# Altium PCB DRV8874 motor driver.PcbDoc
Units mm, origin at the board's own origin, x right, y up, seen from the top; angles counter-clockwise.
Board outline 33.5 x 20 mm, 2 copper layers (Top Layer, Bottom Layer); 15 components, 18 nets, 56 pads, 21 vias.
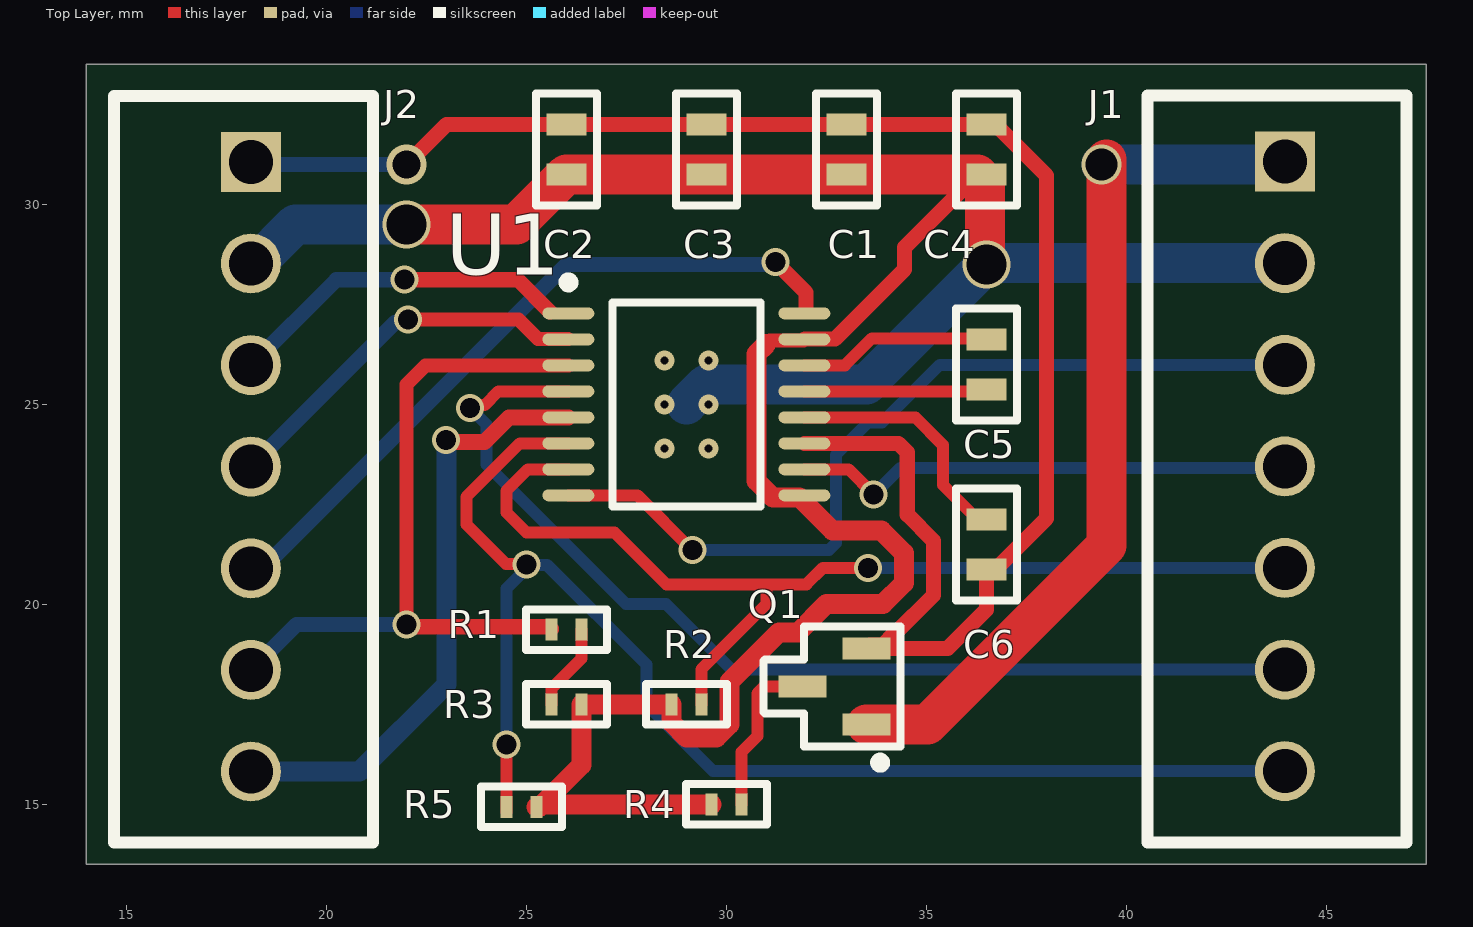
[diagram p0: Top Layer view]
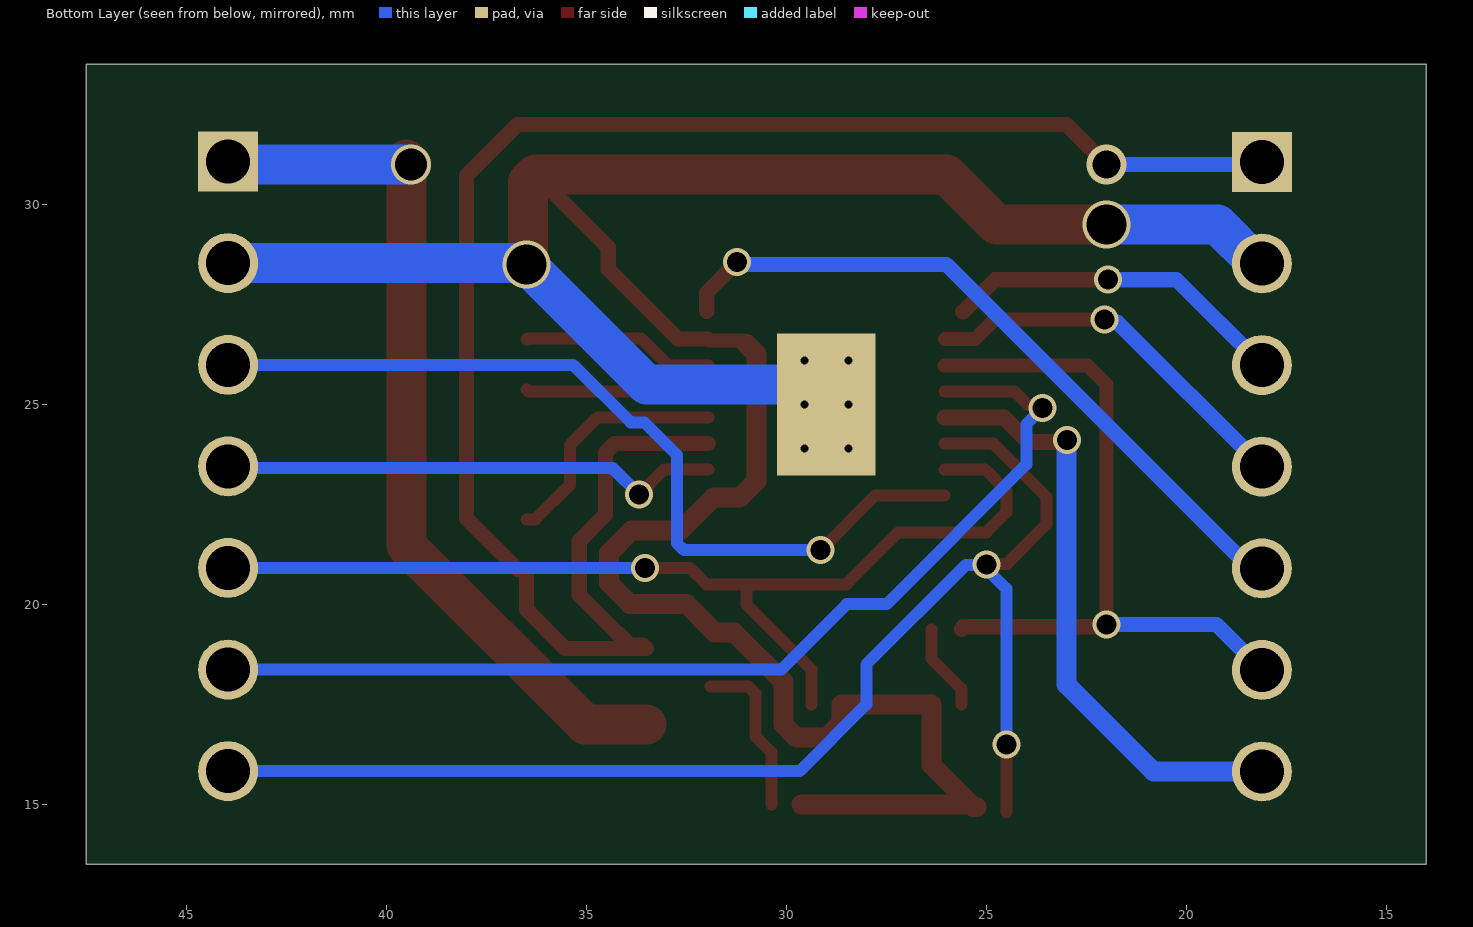
[diagram p1: Bottom Layer view, seen from below]
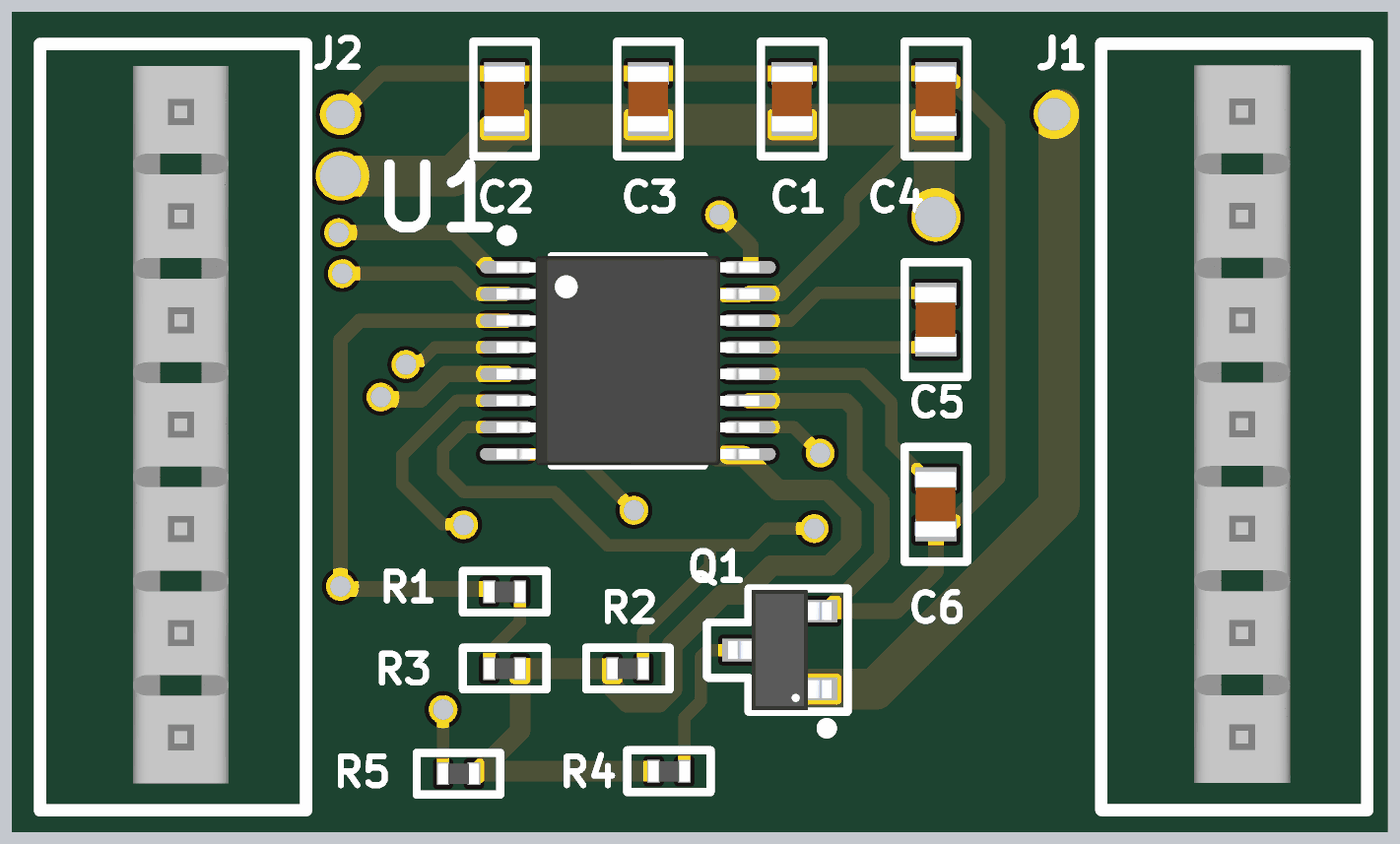
[diagram p2: 3D render of the assembled board from above, using the file's embedded part models]

## Layer stack, top to bottom
Top Solder: solder mask 0.0102, Solder Resist, Dk 3.5
Top Layer: signal copper 0.0356
Dielectric 1: dielectric 0.32, FR-4, Dk 4.8
Bottom Layer: signal copper 0.0356
Bottom Solder: solder mask 0.0102, Solder Resist, Dk 3.5

## Board outline
14,13.5 47.5,13.5 47.5,33.5 14,33.5

## Design rules (kind name [scope] priority, off if disabled: settings)
Clearance [All] p1: gap=0.3 ignorepadtopadclearanceinfootprint=TRUE except(0.1: SMDPad-SMDPad)
PolygonConnect [All] p1: connectstyle=Relief reliefconductorwidth=0.5 reliefentries=4 polygonreliefangle="45 Angle" airgapwidth=0.25
RoutingVias [All] p1: holewidth=0.7 width=1 viastyle="Through Hole" minholewidth=0.3 minwidth=0.5 maxholewidth=1.2 maxwidth=1.5
SolderMaskExpansion [All] p1: expansion=0.102 istentingtop=FALSE
SupplyNets "Schematic Supply Nets" [InNet('GND')] p1: voltage=0.000
Width [All] p1: maxlimit=1 minlimit=0.3 preferedwidth=0.5 minimp=50.000000 maximp=50.000000 favimp=50.000000
30 further rules are at their usual default settings.

## Components (designator, comment, footprint, x,y, rotation, side; value= is the part's Value field where it differs from the comment)
C1 ".1 µF" "CAP SMD" 33,31.375 r270 top
C2 "4.7 µF" "CAP SMD" 26,31.375 r270 top
C3 "4.7 µF" "CAP SMD" 29.5,31.375 r270 top
C4 ".1 µF" "CAP SMD" 36.5,31.375 r270 top
C5 "22 nf" "CAP SMD" 36.5,26 r270 top
C6 "220 nf" "CAP SMD" 36.5,21.5 r270 top
J1 "pin header" "pin header male - duplicate1" 39.641,31.071 r0 top
J2 "pin header" "pin header male - duplicate1" 13.795,31.063 r0 top
Q1 "20V 2.4A" SOTFL95P251X112-3N 32.7,17.95 r180 top
R1 "10k" "SMD RESISTOR" 26,19.37 r180 top
R2 "20K" "SMD RESISTOR" 29,17.5 r180 top
R3 "10k" "SMD RESISTOR" 26,17.5 r180 top
R4 "10k" "SMD RESISTOR" 30,15 r180 top
R5 "2.49K" "SMD RESISTOR" 24.875,14.938 r180 top
U1 "https://www.digikey.com/en/products/base-product/texas-instruments/296/DRV8874/21713" TSOP65P640X120_HS-17N 29,25 r0 top locked

## Footprints (in the part's own frame and the unit in brackets; to place one, negate y for a bottom-side part, rotate by r counter-clockwise, add the part's x,y. Pads: shape width x height; smd on the part's side, far side on the other; paste and mask are expansions set on the pad)
"CAP SMD" [mm]
  rect 0.55x1 smd: 1(-0.625,0) 2(0.625,0)
  silkscreen extent -1.4,-0.76 1.4,0.76, body extent -0.8,-0.51 0.8,0.49, height 0.81
"pin header male - duplicate1" [mm]
  rect 1.5x1.5 hole 1.1: 1(4.318,0)
  round 1.5 hole 1.1: 2(4.318,-2.54) 3(4.318,-5.08) 4(4.318,-7.62) 5(4.318,-10.16) 6(4.318,-12.7) 7(4.318,-15.24)
  silkscreen extent 0.89,-17.02 7.37,1.65, body extent 3.15,-16.36 5.49,1.12, height 10.03
"SMD RESISTOR" [mm]
  rect 0.3x0.55 smd: 1(-0.375,0) 2(0.375,0)
  silkscreen extent -1.02,-0.51 1.02,0.51, body extent -0.5,-0.25 0.5,0.25, height 0.37
SOTFL95P251X112-3N [mm] "SOTFL, 3-Leads, Body 2.92x2.51mm, Pitch 0.95mm, IPC Medium Density"
  rect 1.2x0.55 smd: 1(-0.8,0.95) 2(-0.8,-0.95) 3(0.8,0)
  silkscreen extent -1.65,-1.5 1.78,2.03, body extent -1.25,-1.46 1.25,1.46, height 1.12
TSOP65P640X120_HS-17N [mm] "TSOP, 16-Leads, Body 5.00x4.40mm, Pitch 0.65mm, Thermal Pad 3.55x2.46mm, IPC Medium Density"
  oval 1.3x0.3 smd: 1(-2.95,2.275) 2(-2.95,1.625) 3(-2.95,0.975) 4(-2.95,0.325) 5(-2.95,-0.325) 6(-2.95,-0.975) 7(-2.95,-1.625) 8(-2.95,-2.275) 9(2.95,-2.275) 10(2.95,-1.625) 11(2.95,-0.975) 12(2.95,-0.325) 13(2.95,0.325) 14(2.95,0.975) 15(2.95,1.625) 16(2.95,2.275)
  rect 2.46x3.55 smd far side: "thermal bad"(0,0)
  silkscreen extent -3.07,-2.55 1.85,3.17, body extent -3.2,-2.55 3.2,2.55, height 1.2

## Part data
C1 C2 C3 C4 C5 C6: library part "capacitor smd", "22 µF ±20% 6.3V Ceramic Capacitor X5R 0603 (1608 Metric)"
J1 J2: library part "pin header 7 positions"
Q1: library part "MOSFET P-CH", "P-Channel 20 V 2.4A (Ta) 500mW (Ta) Surface Mount SOT-23-3", Current - Continuous Drain (Id) @ 25°C="2.4A (Ta)", Drain to Source Voltage (Vdss)="Vgs (Max)", Drive Voltage (Max Rds On, Min Rds On)="1.8V, 4.5V", Vgs (Max)=±8V
R1 R2 R3 R4 R5: library part "resistor smd", "10 kOhms ±1% 0.063W, 1/16W Chip Resistor 0402 (1005 Metric) Automotive AEC-Q200, Moisture Resistant Thick Film"
U1: library part "DRV8874 motor driver", "DRV8874 H-BRIDGE MOTOR DRIVER", Current - Output=6A, Operating Temperature="-40°C ~ 125°C (TA)", Voltage - Load="4.5V ~ 37V", Voltage - Supply="0V ~ 5V", Applications="Brushed DC", Mounting Type="Surface Mount"

## Via types
v1: diameter 0.7, hole 0.5, Top Layer to Bottom Layer, 11 vias
v2: diameter 0.5, hole 0.2, Top Layer to Bottom Layer, 6 vias
v3: diameter 1.2, hole 1, Top Layer to Bottom Layer, 2 vias
v4: diameter 1, hole 0.8, Top Layer to Bottom Layer, 1 vias
v5: diameter 1, hole 0.7, Top Layer to Bottom Layer, 1 vias

## Nets (pads, with @x,y where several pads share a name; then routed paths per layer and width w, separated by ;. In a path a pad name is that pad's centre, name@x,y a point inside that pad or via, vN(x,y) a via of type N, cw(c..) or ccw(c..) an arc to the next point about the centre after c; other vN are vias at no path point)
CS: J1.7 R5.2 U1.6 | length 34.1
  Top Layer w0.3: R5.2@24.5,14.813 R5.2 v1(24.5,16.5) ; v1(25,21) 24.984,21.016 24.484,21.016 23.5,22 23.5,22.69 24.835,24.025 U1.6 ; J1.7@43.753,15.625 J1.7
  Bottom Layer w0.3: v1(24.5,16.5) 24.5,20.392 25,20.892 v1(25,21) 25.016,20.984 25.516,20.984 28,18.5 28,17.5 29.669,15.831 J1.7
EN/IN1: J2.3 U1.1 | length 8.7
  Top Layer w0.381: v1(21.957,28.118) 24.788,28.118 U1.1@25.59,27.316
  Bottom Layer w0.381: J2.3 20.248,28.118 v1(21.957,28.118)
GND: "U1.thermal bad" C1.2 C2.2 C3.2 C4.2 J1.2 J2.2 R2.2 R3.1 R4.2 R5.1 U1.9 U1.15 | length 72.1
  Top Layer w0.35: 30.993,26.507 31.085,26.6 31.925,26.6 U1.15
  Top Layer w0.381: U1.15 31.96,26.635 32.715,26.635 34.453,28.372 34.453,28.928 C4.2@36.275,30.75
  Top Layer w0.5: R5.1 25.325,14.938 R5.1@25.387,15 ; R4.2 R5.1@25.387,15 ; 30.993,26.507 30.75,26.265 30.75,23.085 31.16,22.675 31.825,22.675 32.653,21.847 33.873,21.847 34.438,21.282 34.438,20.536 33.91,20.009 32.499,20.009 31.79,19.3 31.311,19.3 30.075,18.064 30.075,16.997 29.753,16.675 28.997,16.675 28.625,17.047 R2.2 R3.1 26.375,15.988 R5.1@25.387,15
  Top Layer w1: v3(22,29.5) 24.75,29.5 C2.2 C3.2 C1.2 36.275,30.75 36.462,30.563 36.462,28.538 v3(36.5,28.5)
  Bottom Layer w0.381: J1.2@43.944,28.515 J1.2
  Bottom Layer w1: J2.2 18.248,28.523 19.225,29.5 v3(22,29.5) ; 29,25 29.5,25.5 33.5,25.5 v3(36.5,28.5) 36.531,28.531 J1.2
IMODE: J1.5 R2.1 U1.7 | length 26.4
  Top Layer w0.3: U1.7 25.033,23.375 24.5,22.842 24.5,22.3 25,21.8 27.2,21.8 28.5,20.5 31,20.5 ; R2.1 29.375,18.375 31,20 31,20.5 ; v1(33.538,20.909) 32.409,20.909 32,20.5 31,20.5
  Bottom Layer w0.3: v1(33.538,20.909) 33.539,20.911 J1.5
NetC5_1: C5.1 U1.14 | length 4.8
  Top Layer w0.3: U1.14 32.962,25.975 33.637,26.65 36.475,26.65 C5.1
NetC5_2: C5.2 U1.13 | length 4.6
  Top Layer w0.3: U1.13 36.45,25.325 C5.2
NetD1_1: Q1.3 R4.1 | length 4.1
  Top Layer w0.3: R4.1 30.375,16.307 30.775,16.707 30.775,17.774 30.951,17.95 Q1.3
NetR1_1: R1.1 R3.2 | length 2.2
  Top Layer w0.3: R3.2 25.625,17.895 26.375,18.645 R1.1
nFAULT: J1.6 U1.4 | length 26.3
  Top Layer w0.3: v1(23.594,24.906) 23.671,24.982 23.954,24.982 24.296,25.325 U1.4
  Bottom Layer w0.3: v1(23.594,24.906) 24,24.5 24,23.5 27.495,20.005 28.495,20.005 30.129,18.371 J1.6
nSLEEP: J2.6 R1.2 U1.3 | length 18.3
  Top Layer w0.35: v1(22,19.5) 22,25.5 22.475,25.975 U1.3
  Top Layer w0.381: v1(22,19.5) 22.061,19.439 25.584,19.439 25.625,19.398 R1.2
  Bottom Layer w0.381: J2.6 19.25,19.5 v1(22,19.5)
OUT1: J1.3 U1.8 | length 21.7
  Top Layer w0.3: U1.8 27.776,22.725 v1(29.146,21.354)
  Bottom Layer w0.3: v1(29.146,21.354) 32.562,21.354 32.738,21.53 32.738,23.738 33.55,24.55 33.894,24.55 35.335,25.991 J1.3
OUT2: J1.4 U1.10 | length 12.6
  Top Layer w0.3: U1.10 33.054,23.375 v1(33.682,22.747)
  Bottom Layer w0.3: v1(33.682,22.747) 34.347,23.411 43.92,23.411 J1.4
PH/IN2: J2.4 U1.2 | length 9.7
  Top Layer w0.35: v1(22.045,27.121) 24.798,27.121 25.285,26.635 U1.2@26.04,26.635
  Bottom Layer w0.381: J2.4 21.731,27.06 21.984,27.06 v1(22.045,27.121)
PMODE: J2.5 U1.16 | length 17.8
  Top Layer w0.381: v1(31.231,28.556) 31.991,27.796 U1.16@31.991,27.328
  Bottom Layer w0.381: J2.5 18.403,20.903 26,28.5 31,28.5 31.056,28.556 v1(31.231,28.556)
VCP: C6.1 U1.12 | length 6.2
  Top Layer w0.3: U1.12 34.722,24.675 35.412,23.985 35.412,22.988 36.275,22.125 C6.1
VIN: J1.1 Q1.1 | length 22.1
  Top Layer w1: Q1.1 35.031,17 39.5,21.469 v4@39.5,31.122
  Bottom Layer w1: v4(39.382,31.004) 39.386,31 43.888,31 J1.1
VM: C1.1 C2.1 C3.1 C4.1 C6.2 J2.1 Q1.2 U1.11 | length 44.6
  Top Layer w0.381: v5(22,31) 23,32 C2.1 C3.1 C1.1 C4.1 36.725,32 38,30.725 38,22.15 36.725,20.875 C6.2 36.5,19.869 35.531,18.9 Q1.2 33.584,18.984 33.91,18.984 34.194,19.269 34.217,19.269 35.178,20.23 35.178,21.589 34.523,22.244 34.523,23.802 34.3,24.025 U1.11
  Bottom Layer w0.381: J2.1 18.176,31 v5(22,31)
VREF: J2.7 U1.5 | length 15.3
  Top Layer w0.4: v1(22.985,24.113) 23.042,24.056 23.946,24.056 24.566,24.675 U1.5
  Bottom Layer w0.5: J2.7 20.823,15.823 23,18 23,24.098 v1(22.985,24.113)
copper on no net:
  other v2: 28.45,23.9 29.55,23.9 28.45,25 29.55,25 28.45,26.1 29.55,26.1